# EAGLE board VCO (EAGLE 8.6.0)
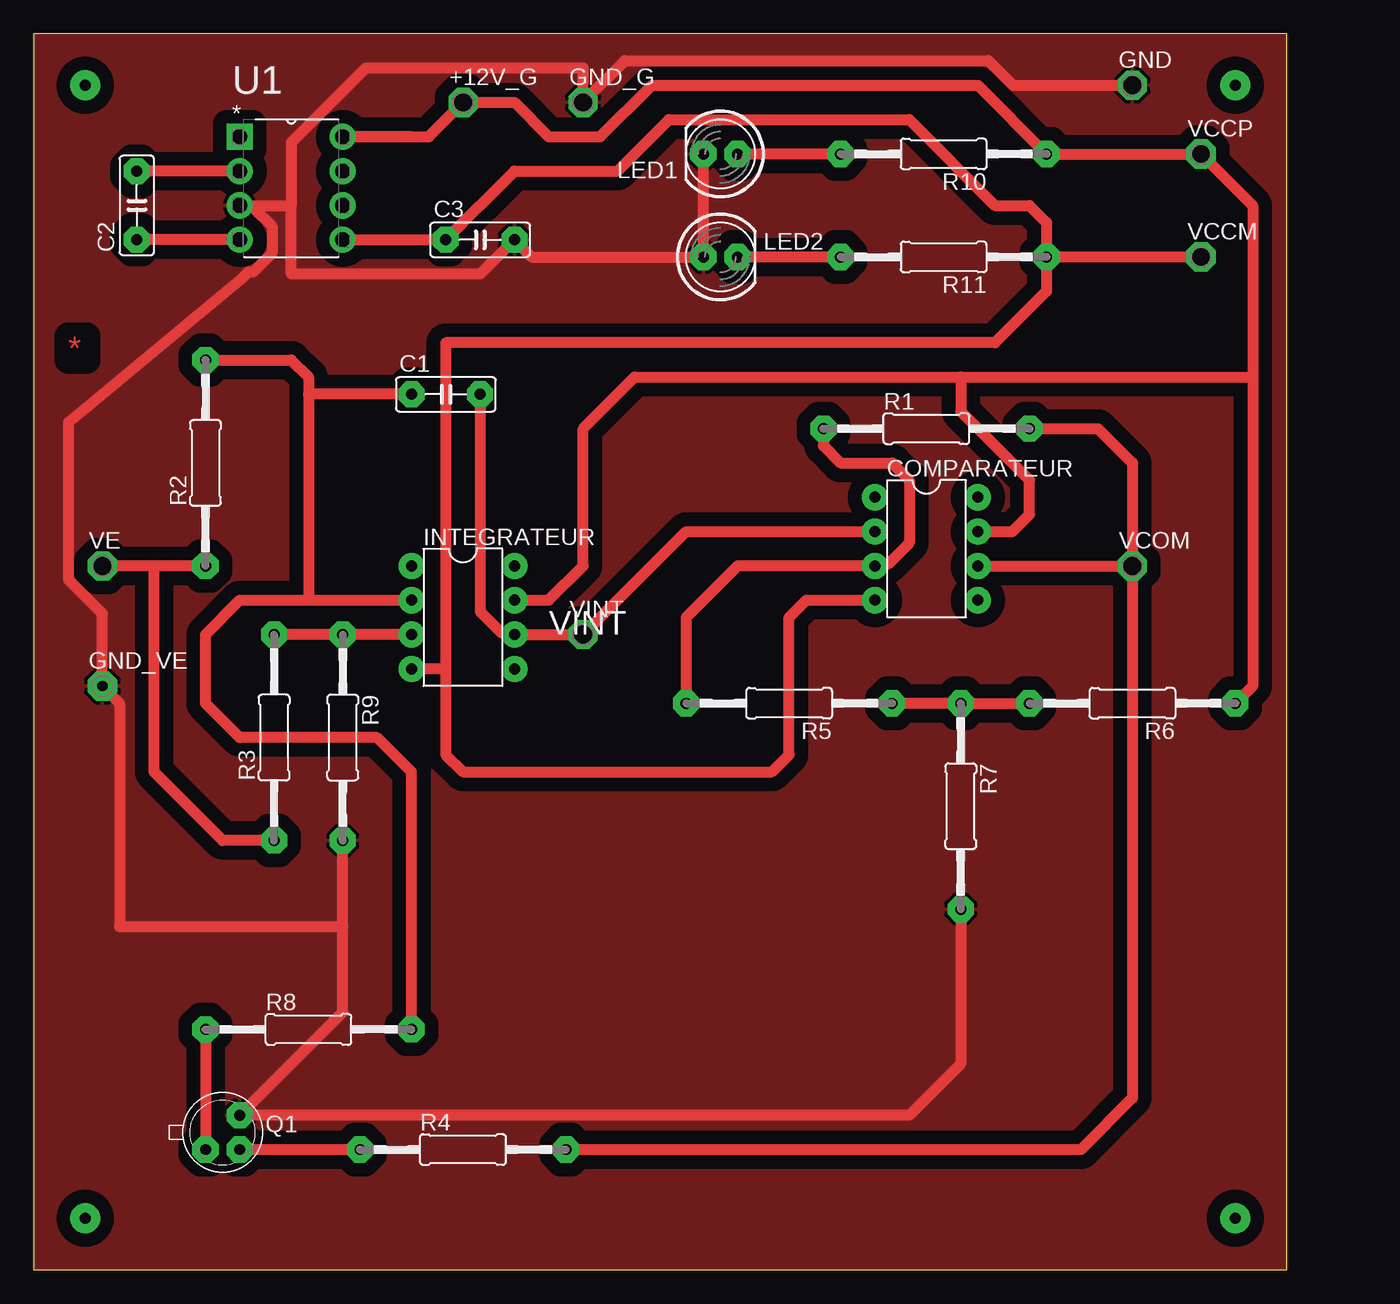
[diagram p0: board, top side]
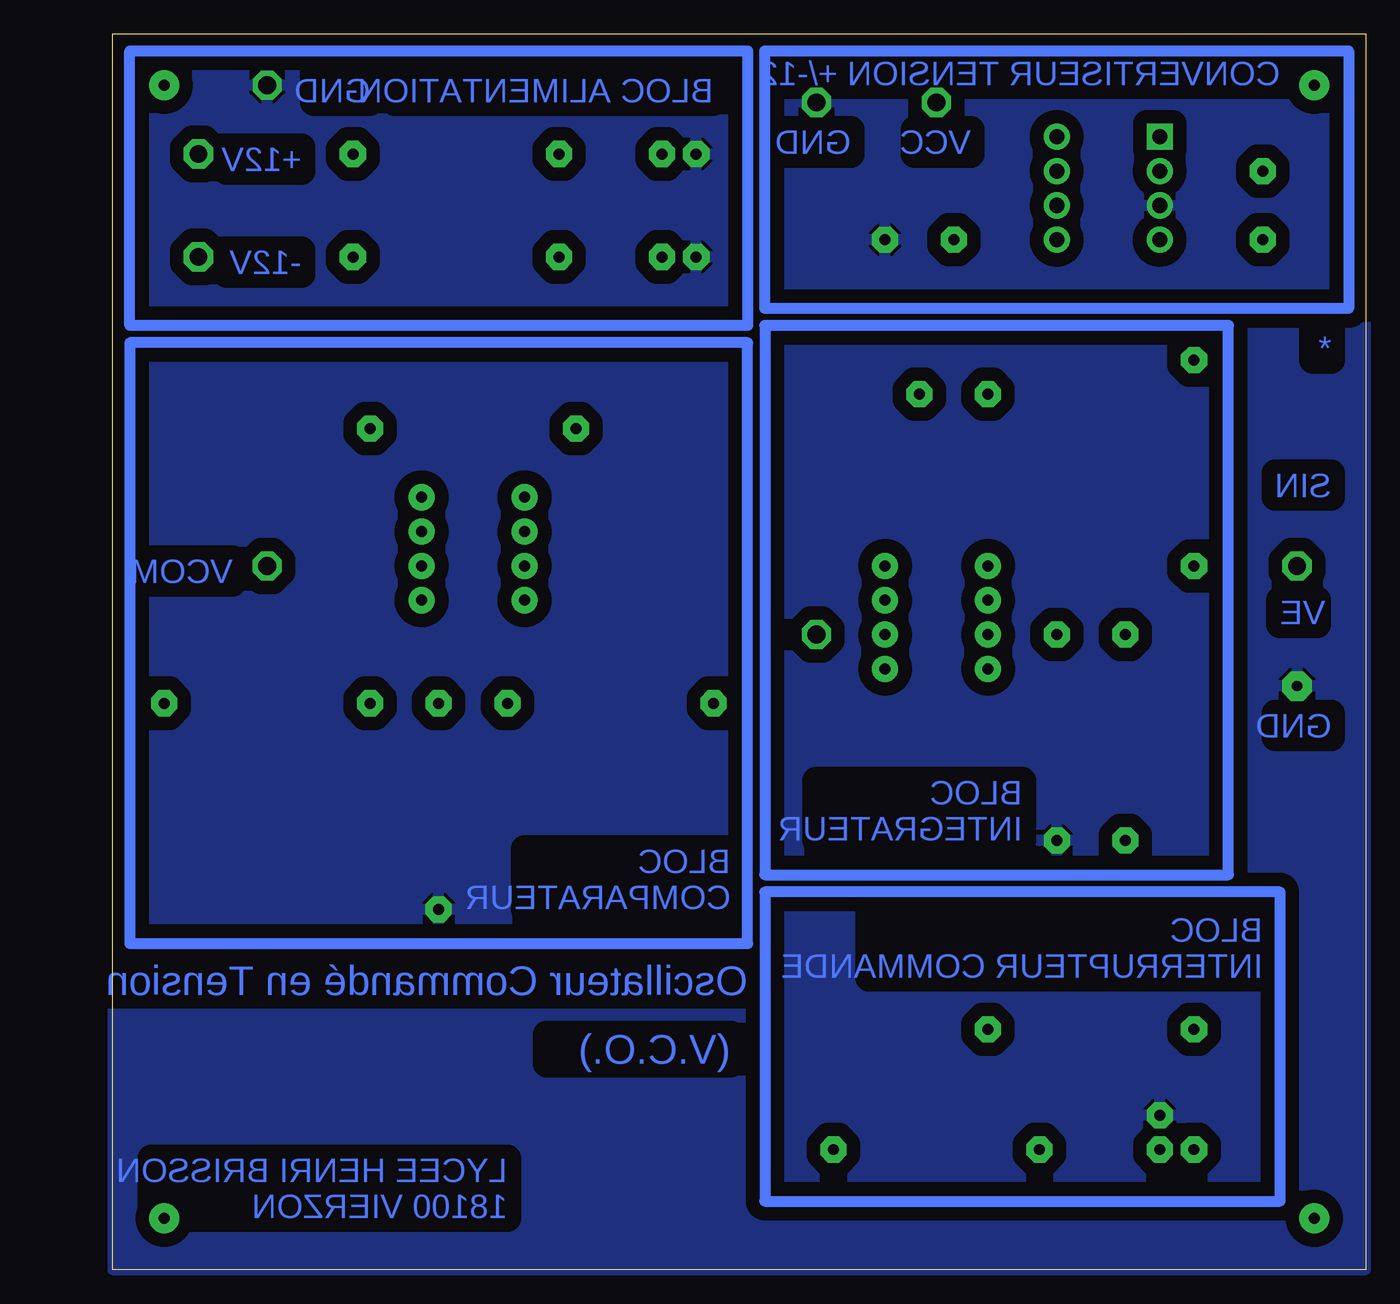
[diagram p1: board, bottom side, seen from below]

Size 92.69 x 91.44 mm. Coordinates in mm from the lower left corner, seen from the top.
Outline: 0,0 92.69,0 92.69,91.44 0,91.44 0,0
Copper layers (1*16): Top 0.035mm / dielectric 1.5mm / Bottom 0.035mm
Design rules "default *": minimum track width 6mil, minimum drill 0.35mm, track to track 40mil, track to pad 40mil, pad to pad 6mil, via to via 6mil, smd to smd 6mil, copper to edge 0mil, drill to drill 6mil, minimum pad ring 10mil, minimum via ring 8mil, stop-mask expansion 4mil, vias tented up to drill 0mil, thermal gap 10mil

## Footprints (pad centres in the part's own frame; a part is rotated, then mirrored left to right if it is on the bottom)
P1-13 = drill 1.321 pad 2.159 octagon: TP 0,0
C050-025X075 = drill 0.813 pad 1.93 octagon: 1 -2.54,0; 2 2.54,0
DIL08 = drill 0.813 pad 1.93: 1 -3.81,-3.81; 2 -1.27,-3.81; 3 1.27,-3.81; 4 3.81,-3.81; 5 3.81,3.81; 6 1.27,3.81; 7 -1.27,3.81; 8 -3.81,3.81
P1-9 = drill 0.75 pad 2.184 octagon: TP 0,0
LED5MM = drill 0.813 pad 1.93 octagon: A -1.27,0; K 1.27,0
TO18 = drill 0.813 pad 1.93 octagon: 1 -1.27,-1.27; 2 1.27,-1.27; 3 1.27,1.27
0207/15 = drill 0.813 pad 1.93 octagon: 1 -7.62,0; 2 7.62,0
DIP254P762X533-8 = drill 1.118 pad 1.93 square: 1 -7.62,7.62 | drill 1.118 pad 1.93: 2 -7.62,5.08; 3 -7.62,2.54; 4 -7.62,0; 5 0,0; 6 0,2.54; 7 0,5.08; 8 0,7.62

## Placement (x,y rotation side)
+12V_G  TPSPAD1-20  [P1-13]  31.75,86.36 0 top  (not fitted)
C1  1nF  [C050-025X075]  30.48,64.77 0 top
C2  [C050-025X075]  7.62,78.74 90 top
C3  [C050-025X075]  33.02,76.2 0 top
COMPARATEUR  LM741P  [DIL08]  66.04,53.34 270 top
GND  TPPAD1-13  [P1-13]  81.28,87.63 0 top  (not fitted)
GND_G  TPSPAD1-20  [P1-13]  40.64,86.36 0 top  (not fitted)
GND_VE  TPS  [P1-9]  5.08,43.18 0 top  (not fitted)
INTEGRATEUR  LM741P  [DIL08]  31.75,48.26 270 top
LED1  [LED5MM]  50.8,82.55 180 top
LED2  [LED5MM]  50.8,74.93 0 top
Q1  2N2222  [TO18]  13.97,10.16 0 top
R1  10k  [0207/15]  66.04,62.23 0 top
R2  100k  [0207/15]  12.7,59.69 90 top
R3  100k  [0207/15]  17.78,39.37 90 top
R4  1k  [0207/15]  31.75,8.89 0 top
R5  10k  [0207/15]  55.88,41.91 180 top
R6  1k  [0207/15]  81.28,41.91 180 top
R7  1k  [0207/15]  68.58,34.29 270 top
R8  47k  [0207/15]  20.32,17.78 0 top
R9  100k  [0207/15]  22.86,39.37 270 top
R10  1k  [0207/15]  67.31,82.55 180 top
R11  1k  [0207/15]  67.31,74.93 180 top
U1  ICL7660ACPAZ  [DIP254P762X533-8]  22.86,76.2 0 top  (not fitted)
VCCM  TPPAD1-13  [P1-13]  86.36,74.93 0 top  (not fitted)
VCCP  TPPAD1-13  [P1-13]  86.36,82.55 0 top  (not fitted)
VCOM  TPPAD1-13  [P1-13]  81.28,52.07 0 top  (not fitted)
VE  TPPAD1-13  [P1-13]  5.08,52.07 0 top  (not fitted)
VINT  TPPAD1-13  [P1-13]  40.64,46.99 0 top  (not fitted)

## Library data of the parts
+12V_G C1-C3 COMPARATEUR GND_G GND_VE INTEGRATEUR LED1 LED2 Q1 R1-R11 = VCO
GND VCCM VCCP VCOM VE VINT = testpad
U1 = ICL7660; MPN: ICL7660ACPAZ; OC_FARNELL: 1562064; OC_NEWARK: 79K6924; PACKAGE: PDIP-8; SUPPLIER: INTERSIL

## Nets
+5V: R2.1 R3.1 VE.TP
+12V: +12V_G.TP COMPARATEUR.7 INTEGRATEUR.7 R6.1 R10.1 U1.8 VCCP.TP
-12V: C3.1 COMPARATEUR.4 INTEGRATEUR.4 R11.1 U1.5 VCCM.TP
GND: C3.2 GND.TP GND_G.TP GND_VE.TP LED1.K LED2.A Q1.3 R7.2 R9.2 U1.3
N$1: C2.2 U1.2
N$2: INTEGRATEUR.3 R3.2 R9.1
N$3: Q1.1 R8.1
N$4: Q1.2 R4.1
N$5: C1.1 INTEGRATEUR.2 R2.2 R8.2
N$6: C1.2 COMPARATEUR.2 INTEGRATEUR.6 VINT.TP
N$7: R5.1 R6.2 R7.1
N$8: COMPARATEUR.3 R1.1 R5.2
N$10: COMPARATEUR.6 R1.2 R4.2 VCOM.TP
N$11: LED1.A R10.2
N$12: LED2.K R11.2
S$14: C2.1 U1.4

## Tracks (layer width: path | path; a pad name or v marks a point on that pad's centre or on a via)
+5V
  Top 0.813: R2.1 8.89,52.07 | 8.89,52.07 VE.TP | R3.1 13.97,31.75 8.89,36.83 8.89,52.07
+12V
  Top 0.813: R6.1 90.17,43.18 90.17,66.04 | 90.17,66.04 90.17,78.74 VCCP.TP R10.1 69.85,87.63 45.72,87.63 41.91,83.82 38.1,83.82 35.56,86.36 +12V_G.TP 29.21,83.82 U1.8 27.94,83.82 | COMPARATEUR.7 72.39,54.61 73.66,55.88 73.66,58.42 68.58,63.5 68.58,66.04 | INTEGRATEUR.7 38.1,49.53 40.64,52.07 40.64,62.23 44.45,66.04 68.58,66.04 | 68.58,66.04 90.17,66.04
-12V
  Top 0.813: VCCM.TP R11.1 | 30.48,44.45 INTEGRATEUR.4 | 30.48,44.45 30.48,68.58 71.12,68.58 74.93,72.39 R11.1 | 30.48,44.45 30.48,38.1 31.75,36.83 54.61,36.83 55.88,38.1 55.88,48.26 57.15,49.53 COMPARATEUR.4 | U1.5 C3.1 | C3.1 31.75,77.47 | R11.1 74.93,77.47 73.66,78.74 71.12,78.74 64.77,85.09 46.99,85.09 43.18,81.28 35.56,81.28 C3.1
GND
  Top 0.813: 22.86,25.4 22.86,19.05 Q1.3 64.77,11.43 68.58,15.24 R7.2 | 22.86,25.4 R9.2 | GND.TP 72.44,87.63 70.61,89.46 43.74,89.46 GND_G.TP 40.64,88.9 24.56,88.9 19.05,83.39 19.05,78.74 | 22.86,25.4 6.35,25.4 6.35,41.91 GND_VE.TP 5.08,48.53 2.58,51.03 2.58,62.7 15.45,73.4 15.86,73.81 16.23,73.81 17.63,75.21 17.63,77.19 16.23,78.59 15.39,78.59 U1.3 19.05,78.74 | 19.05,78.74 19.05,73.66 33.02,73.66 C3.2 36.83,74.93 LED2.A LED1.K
  pour Top: 0,91.44 92.71,91.44 92.71,0 0,0
  pour Bottom: 0,91.44 92.71,91.44 92.71,0 0,0
N$1
  Top 0.813: U1.2 C2.2
N$2
  Top 0.813: R3.2 R9.1 INTEGRATEUR.3
N$3
  Top 0.813: R8.1 Q1.1
N$4
  Top 0.813: R4.1 Q1.2
N$5
  Top 0.813: R8.2 27.94,36.83 25.4,39.37 15.24,39.37 12.7,41.91 12.7,46.99 15.24,49.53 20.32,49.53 | 20.32,49.53 INTEGRATEUR.2 | 20.32,64.77 20.32,49.53 | C1.1 20.32,64.77 | R2.2 19.05,67.31 20.32,66.04 20.32,64.77
N$6
  Top 0.813: C1.2 33.02,48.69 34.57,47.14 35.41,47.14 INTEGRATEUR.6 VINT.TP 48.26,54.61 COMPARATEUR.2
N$7
  Top 0.813: R6.2 R7.1 R5.1
N$8
  Top 0.813: R5.2 48.26,48.26 52.07,52.07 COMPARATEUR.3 62.38,52.22 63.22,52.22 64.77,53.77 64.77,58.42 63.5,59.69 59.69,59.69 58.42,60.96 R1.1
N$10
  Top 0.813: COMPARATEUR.6 VCOM.TP | VCOM.TP 81.28,59.69 78.74,62.23 R1.2 | VCOM.TP 81.28,12.7 77.47,8.89 R4.2
N$11
  Top 0.813: R10.2 LED1.A
N$12
  Top 0.813: R11.2 LED2.K
S$5
  Bottom 0.813: 10.16,69.85 44.45,69.85 44.45,29.21 10.16,29.21 10.16,69.85
S$6
  Bottom 0.813: 45.72,90.17 45.72,69.85 91.44,69.85 91.44,90.17 45.72,90.17
S$7
  Bottom 0.813: 45.72,68.58 91.44,68.58 91.44,24.13 45.72,24.13 45.72,68.58
S$8
  Bottom 0.813: 44.45,27.94 44.45,5.08 6.35,5.08 6.35,27.94 44.45,27.94
S$10
  Bottom 0.813: 1.27,71.12 44.45,71.12 44.45,90.17 1.27,90.17 1.27,71.12
S$11  (via drill 0.8 pad 2.2)
  other vias: 3.81,87.63
S$12  (via drill 0.8 pad 2.2)
  other vias: 88.9,87.63
S$13  (via drill 0.8 pad 2.2)
  other vias: 3.81,3.81
S$14
  Top 0.813: U1.4 C2.1
S$15  (via drill 0.8 pad 2.2)
  other vias: 88.9,3.81

## Text on the board
Top: *
Bottom: CONVERTISEUR TENSION +/-12 | BLOC ALIMENTATION | GND | VCC | GND | +12V | -12V | * | SIN | VCOM | VE | GND | BLOC / INTEGRATEUR | BLOC / COMPARATEUR | BLOC / INTERRUPTEUR COMMANDE | Oscillateur Commandé en Tension | (V.C.O.) | LYCEE HENRI BRISSON / 18100 VIERZON
tNames: VINT